# Altium PCB batt_ctrl_pcb_v3.4.PcbDoc (part 2 of 2)
Units mm, origin at the board's own origin, x right, y up, seen from the top; angles counter-clockwise.
Board outline 70 x 60 mm, 2 copper layers (Top Layer, Bottom Layer); 136 components, 122 nets, 406 pads, 183 vias.
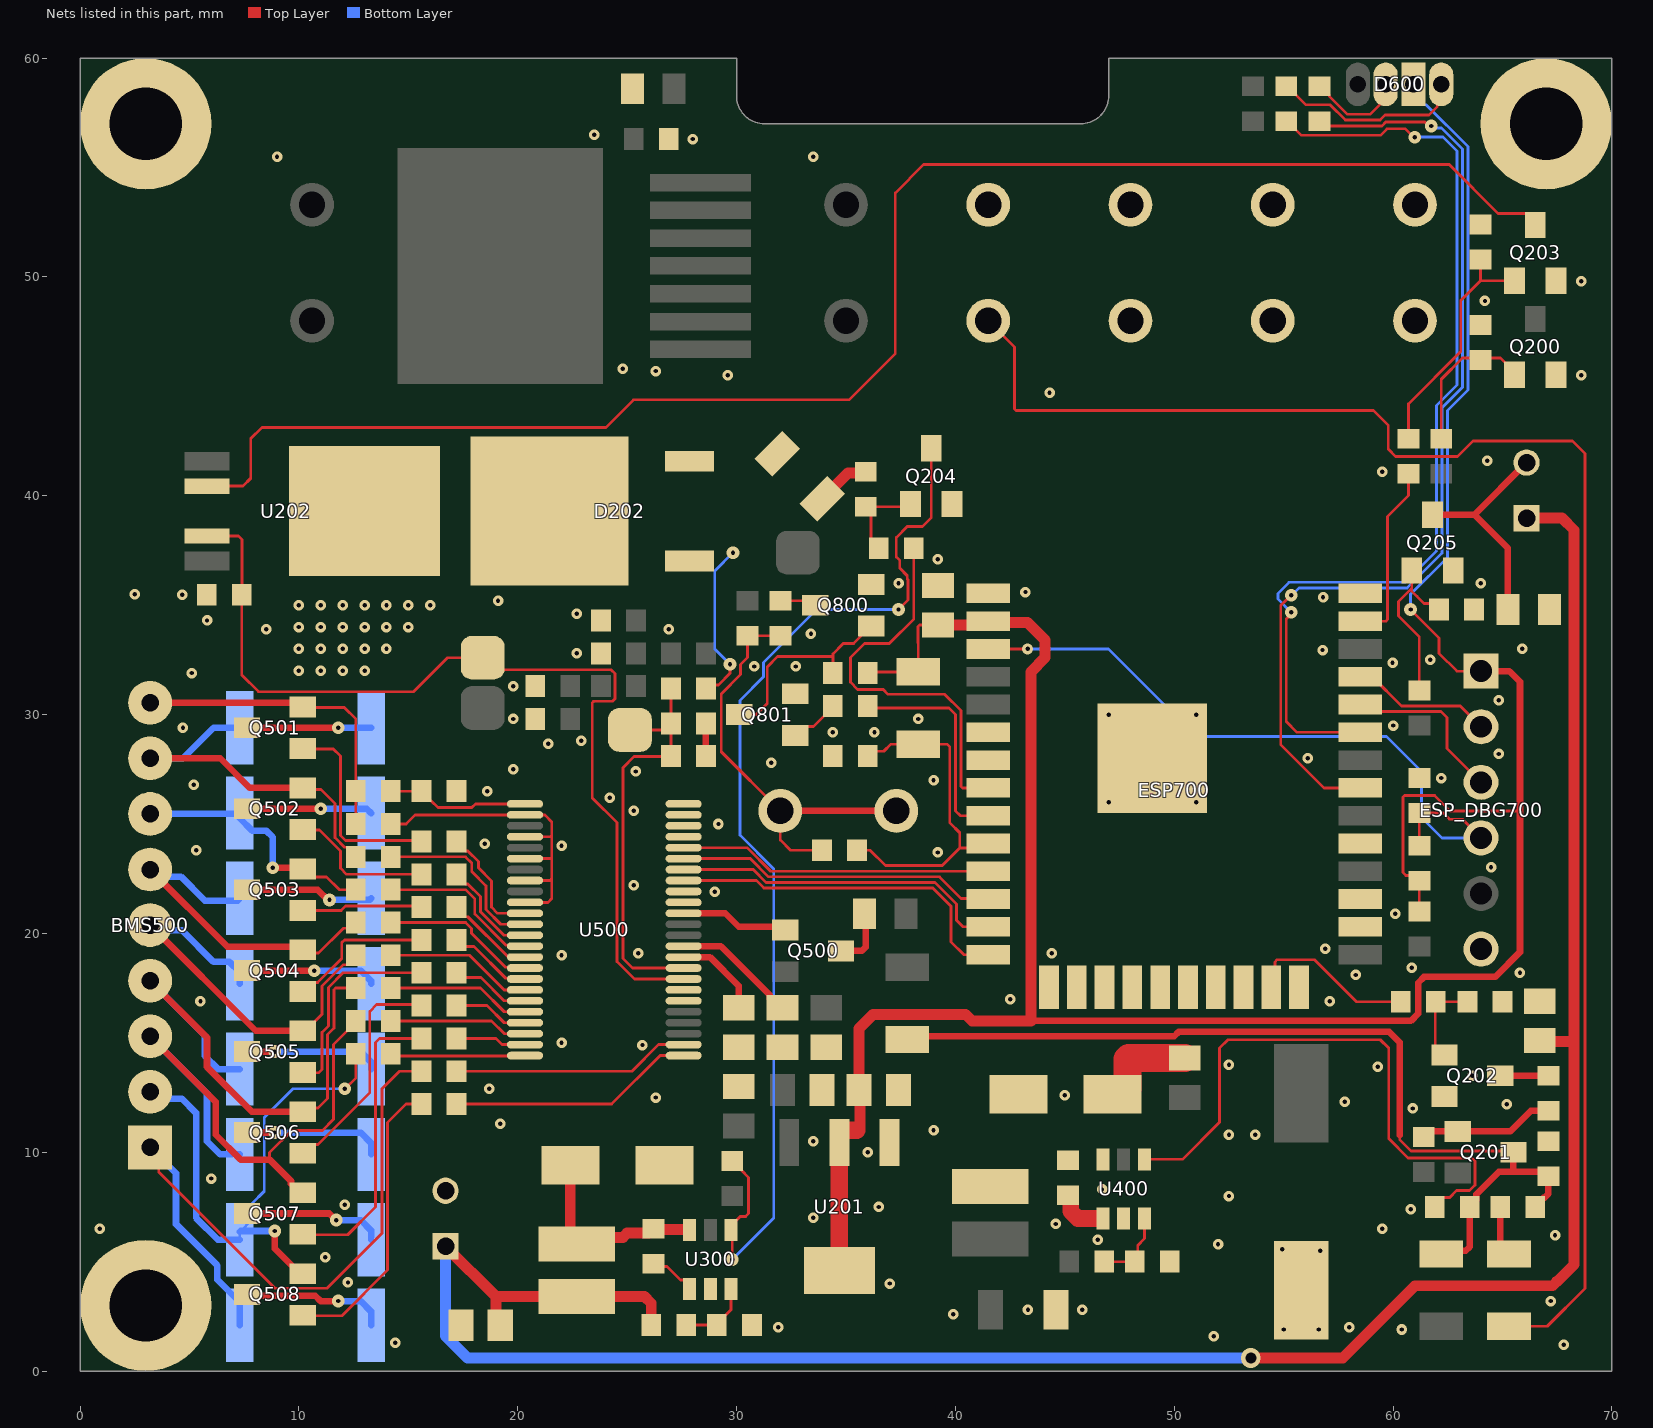
[diagram p2: the nets of this part, all layers, seen from the top]

## Via types
v1: diameter 0.48, hole 0.2, Top Layer to Bottom Layer, 147 vias
v2: diameter 0.58, hole 0.2, Top Layer to Bottom Layer, 34 vias
v3: diameter 0.9, hole 0.5, Top Layer to Bottom Layer, 1 vias
v4: diameter 0.5, hole 0.2, Top Layer to Bottom Layer, 1 vias

## Nets (pads, with @x,y where several pads share a name; then routed paths per layer and width w, separated by ;. In a path a pad name is that pad's centre, name@x,y a point inside that pad or via, vN(x,y) a via of type N, cw(c..) or ccw(c..) an arc to the next point about the centre after c; other vN are vias at no path point) (continued)
CELL1: BMS500.2 Q508.2 R521.1 R522.1 | length 26
  Top Layer w0.127: v2(12.1,12.9) 12.6,13.4 R522.1@12.6,14.5
  Top Layer w0.3: v2(8.9,6.4) 8.9,5.6 10.05,4.45 Q508.2@10.175,4.45
  Bottom Layer w0.127: R521.1@7.3,6 7.3,6.363 7.862,6.924 7.862,7.662 8.417,8.217 8.417,11.587 9.73,12.9 v2(12.1,12.9)
  Bottom Layer w0.3: BMS500.2@3.2,12.76 3.51,12.45 4.65,12.45 5.3,11.8 5.3,7 6.3,6 R521.1@7.3,6 ; R521.1@7.3,6.363 7.337,6.4 v2(8.9,6.4)
CELL2: BMS500.3 Q507.2 R518.1 R519.1 | length 27.3
  Top Layer w0.127: 8.661,9.664 8.661,9.986 9.673,10.998 11.069,10.998 11.576,11.506 11.576,14.926 12.6,15.95 R519.1@12.6,16
  Top Layer w0.3: BMS500.3@3.2,15.3 6.2,12.3 6.2,10.8 7.336,9.664 8.661,9.664 9.638,8.687 9.638,8.562 10.05,8.15 Q507.2@10.175,8.15
  Bottom Layer w0.3: BMS500.3@3.2,15.3 5.8,12.7 5.8,10.5 6.4,9.9 R518.1@7.3,9.9
CELL3: BMS500.4 Q506.2 R515.1 R516.1 | length 23.4
  Top Layer w0.127: Q506.2@10.751,12.025 10.876,12.025 11.305,12.454 11.305,15.375 11.6,15.67 11.6,17.422 11.678,17.5 R516.1@12.6,17.5
  Top Layer w0.3: BMS500.4@3.2,17.84 5.8,15.24 5.8,13.9 7.85,11.85 Q506.2@10.175,11.85
  Bottom Layer w0.3: BMS500.4@3.2,17.84 5.7,15.34 5.7,14.4 6.3,13.8 R515.1@7.3,13.8
CELL4: BMS500.5 Q505.2 R512.1 R513.1 | length 18.4
  Top Layer w0.127: Q505.2@10.712,15.961 11.056,16.306 11.056,17.597 12.023,18.563 12.214,18.563 12.6,18.95 R513.1@12.6,19
  Top Layer w0.3: BMS500.5@3.2,20.38 8.03,15.55 Q505.2@10.175,15.55
  Bottom Layer w0.3: BMS500.5@3.2,20.38 3.43,20.15 4.65,20.15 6.1,18.7 6.825,18.7 7.3,18.225 R512.1@7.3,17.7
CELL5: BMS500.6 Q504.2 R509.1 R510.1 | length 15.6
  Top Layer w0.127: Q504.2@10.766,19.1 10.9,19.1 12.034,20.234 12.334,20.234 R510.1@12.6,20.5
  Top Layer w0.3: BMS500.6@3.2,22.92 6.72,19.4 10.025,19.4 Q504.2@10.175,19.25
  Bottom Layer w0.3: BMS500.6@3.2,22.92 3.525,22.595 4.605,22.595 5.7,21.5 7.2,21.5 R509.1@7.3,21.6
CELL6: BMS500.7 Q503.2 R506.1 R507.1 | length 11.8
  Top Layer w0.127: Q503.2@10.125,23 Q503.2@10.175,22.95 10.541,22.584 11.26,22.584 11.844,22 R507.1@12.6,22
  Top Layer w0.3: v2(8.8,23) Q503.2@10.125,23
  Bottom Layer w0.3: BMS500.7@3.2,25.46 7.26,25.46 R506.1@7.3,25.5 7.3,25.261 7.862,24.7 8.5,24.7 8.8,24.4 v2(8.8,23)
CELL7: BMS500.8 Q502.2 R502.1 R503.1 | length 16.9
  Top Layer w0.127: Q502.2@10.175,26.65 10.249,26.576 11,26.576 11.646,25.93 11.646,24.375 12.085,23.937 12.214,23.937 12.6,23.55 R503.1@12.6,23.5
  Top Layer w0.3: BMS500.8@3.2,28 6.4,28 7.75,26.65 Q502.2@10.175,26.65
  Bottom Layer w0.3: BMS500.8@3.2,28 4.7,28 6.1,29.4 R502.1@7.3,29.4
CELL8: BMS500.9 Q501.2 R500.1 R504.1 | length 14.5
  Top Layer w0.127: Q501.2@10.175,30.35 10.195,30.33 12.07,30.33 12.6,29.8 R500.1@12.6,26.5 R504.1@12.6,25
  Top Layer w0.3: BMS500.9@3.2,30.54 9.985,30.54 Q501.2@10.175,30.35
CELL-: BMS500.1 R524.1 R525.1 | length 33.3
  Top Layer w0.127: BMS500.1@3.2,10.22 3.596,9.824 3.596,9.104 8.916,3.785 11.285,3.785 13.8,6.3 13.8,12.9 14.6,13.7 R525.1@15.6,13.7
  Bottom Layer w0.3: BMS500.1@3.2,10.22 4.383,9.037 4.383,6.717 6.277,4.823 6.277,4.173 7.3,3.15 R524.1@7.3,2.1
CHR_EN: ESP700.37 R214.1 | length 8.3
  Top Layer w0.127: ESP700.37@58.5,34.27 59.672,34.27 59.746,34.344 59.746,39.057 60.7,40.011 R214.1@60.7,41
CHR_I_MEAS: pad.@18.4,32.6 R215.2 U202.4 U500.32 | length 44.1
  Top Layer w0.127: U202.4@5.8,38.16 7.24,38.16 7.4,38 7.4,35.49 R215.2@7.385,35.475 7.385,31.815 8.152,31.048 15.248,31.048 16.8,32.6 pad.@18.4,32.6 18.95,32.05 24.269,32.05 24.441,31.879 24.441,30.721 24.329,30.609 23.474,30.609 23.4,30.535 23.4,26.201 24.54,25.061 24.54,18.71 25.332,17.918 U500.32@27.581,17.918
CHR_MEAS: C208.1 pad.@25.127,29.3 R213.1 R217.2 U500.33 | length 19.8
  Top Layer w0.127: pad.@24.6,29 pad.@25.127,29.3 26.7,29.3 R217.2@27,29.6 ; R213.1@27,31.2 R217.2@27,29.6 ; U500.33@27.581,18.418 25.242,18.418 24.808,18.852 24.808,27.571 25.319,28.081 26.981,28.081 C208.1@27,28.1 R217.2@27,29.6
CHR_POS: CHR+200.1 D201.1 D202.1 D202.3 R213.2 R226.2 | length 82.5
  Top Layer w0.127: R213.2@28.6,31.2 28.754,31.354 29.166,31.354 29.7,31.888 v2(29.7,32.3) ; CHR+200.1@41.5,48 42.7,46.8 42.7,43.974 42.774,43.9 59.1,43.9 59.783,43.217 59.783,42.124 60.107,41.8 62.95,41.8 63.65,42.5 68.2,42.5 68.773,41.927 68.773,3.777 67.045,2.049 D201.1@65.3,2.049
  Bottom Layer w0.127: v2(29.7,32.3) 29,33 29,36.566 v2(29.834,37.4)
CHR_SUP: D202.2 U202.3
  other v1: 10,32 11,32 12,32 13,32 10,33 11,33 12,33 13,33 14,33 10,34 11,34 12,34 13,34 14,34 15,34 10,35 11,35 12,35 13,35 14,35 15,35 16,35
COM_EN: D200.2 D203.1 Q201.3 R208.2 R210.1 R224.2 | length 43.1
  Top Layer w0.127: 60.3,10.778 60.3,10.581 60.821,10.059 65.441,10.059 Q201.3@65.5,10
  Top Layer w0.3: D203.1@37.8,15.149 37.951,15.3 50,15.3 50.2,15.5 59.824,15.5 60.3,15.024 60.3,10.778 ; D200.2@62.2,5.351 62.349,5.5 63.324,5.5 63.5,5.676 R208.2@63.5,7.5 63.8,7.8 63.8,8.074 64.826,9.1 65.5,9.1 ; Q201.3@65.5,10 65.5,9.1 ; R224.2@66.5,7.5 66.5,7.55 66.874,7.924 66.924,7.924 67.1,8.1 R210.1@67.1,8.9 66.9,9.1 65.5,9.1
DATABUS: BLDC_DATA800.1 R800.1 R802.2 R803.2 | length 20
  Top Layer w0.127: R802.2@32.05,33.6 R802.2@32,33.6 R800.1@30.5,33.6 30.5,32.609 30.18,32.289 30.18,31.829 29.3,30.948 29.3,28.3 BLDC_DATA800.1@32,25.6 32,24.268 32.468,23.8 R803.2@33.9,23.8 ; 34.6,25.65 34.65,25.6
  Top Layer w0.3: BLDC_DATA800.1@32,25.6 34.65,25.6 BLDC_DATA800.1@37.3,25.6
DCDC_EN: ESP700.23 R211.1 | length 7.8
  Top Layer w0.127: ESP700.23@54.435,17.54 54.6,17.705 54.6,18.7 54.7,18.8 56.4,18.8 58.324,16.876 R211.1@60.35,16.876
DRIVE: Q500.1 U500.38 | length 5
  Top Layer w0.3: U500.38@27.581,20.918 29.482,20.918 30.1,20.3 32.075,20.3 Q500.1@32.225,20.15
DTR: C100.1 ESP700.3 ESP_DBG700.4 R700.2 | length 32.1
  Top Layer w0.127: ESP700.3@41.5,33 v4(43.3,33) ; R700.2@61.2,24 C100.1@61.2,25.5 62.3,25.5 62.58,25.22 63.162,25.22 ESP_DBG700.4@64.018,24.364
  Bottom Layer w0.127: v4(43.3,33) 47,33 51,29 59.7,29 61.3,27.4 61.3,25.3 62.236,24.364 ESP_DBG700.4@64.018,24.364
GND: BAT-200.1 BLDC-200.1 C100.2 C200.2 C201.2 C202.- C203.1 C204.2 C205.2 C206.2 C207.2 C208.2 C209.2 C210.2 C211.2 C500.2 C501.2 C502.2 C503.2 CHR-200.1 CN200.2 D300.A D400.A ESP700.1 ESP700.15 ESP700.27 ESP700.38 ESP700.39 ESP_DBG700.6 MH200.1 MH201.1 MH202.1 Q200.2 Q202.2 Q203.2 Q204.2 Q205.2 Q800.2 Q801.2 R202.1 R204.1 R205.1 R206.1 R207.1 R210.2 R212.1 R215.1 R216.1 R217.1 R221.2 R223.1 R225.1 R226.1 R301.1 R401.1 R804.1 U201.1 U300.2 U400.2 U500.30 U500.31 U500.40 U500.45 U500.46 U500.47 U500.48 | length 9.1
  Top Layer w0.3: C208.2@28.6,28.1 R217.1@28.6,29.6 ; R301.1@30.489,2.311 R301.1@30.7,2.1
  Top Layer w0.5: R226.1@33.918,39.869 35.085,41.035 35.835,41.035 R221.2@35.9,41.1
  Top Layer w1.27: D400.A@47.18,12.644 47.63,12.644 47.87,12.884 47.87,14.252 47.924,14.306 C203.1@50.482,14.306
  other v1: 67.8,1.2 14.4,1.3 51.8,1.6 55,1.9 56.6,1.9 60.4,1.9 31.9,2 58,2 39.9,2.6 43.314,2.8 45.8,2.8 67.2,3.2 37,4 12.24,4.05 11.2,5.2 56.667,5.5 54.933,5.559 52,5.8 46.5,6 67.4,6.2 0.9,6.5 59.5,6.5 44.585,6.721 33.5,7 60.8,7.4 36.5,7.5 12.1,7.6 52.5,8 46.7,8.3 6,8.8 36,10 33.5,10.5 52.5,10.8 53.7,10.8 39,11 19.2,11.3 60.9,12 65.2,12.2 57.8,12.3 26.3,12.5 45,12.6 18.7,12.9 63.625,13.5 59.3,13.9 52.5,14 25.7,14.9 22,15 5.5,16.9 57.1,16.9 42.5,17 58.3,18.1 65.8,18.2 60.85,18.425 22,19 25.5,19.1 44.4,19.1 56.9,19.3 60.1,20.9 29,21.9 25.3,22.2 64.475,23.025 39.2,23.7 5.3,23.8 22,24 18.5,24.1 29.171,25 25.3,25.6 47,26 51,26 24.2,26.2 18.6,26.5 5.2,26.8 39,27 62.2,27.1 25.4,27.4 19.8,27.5 31.589,27.801 56.1,28 64.825,28.2 21.395,28.66 22.9,28.8 34.4,29.2 36.3,29.2 4.7,29.4 60,29.5 19.8,29.8 38.3,29.8 47,30 51,30 64.825,30.65 19.8,31.3 5.1,31.9 30.8,32.2 32.7,32.2 59.975,32.375 61.7,32.5 22.7,32.8 56.775,32.95 65.9,33 33.4,33.7 8.5,33.9 26.895,33.9 5.8,34.3 22.7,34.6 19.1,35.2 56.8,35.358 4.672,35.475 2.5,35.5 43.2,35.6 37.4,36 64,36 39.2,37.1 59.5,41.1 64.3,41.6 44.3,44.7 29.6,45.5 68.6,45.5 26.3,45.7 24.8,45.8 64.2,48.9 68.6,49.8 9,55.5 33.5,55.5 28,56.3 23.5,56.5
GRED_LED_OD: ESP700.31 R601.2 | length 45.2
  Top Layer w0.127: v2(55.347,35.458) 54.864,34.976 54.864,28.627 56.841,26.65 ESP700.31@58.5,26.65 ; R601.2@56.642,57.112 56.858,56.896 59.489,56.896 59.667,57.074 61.447,57.074 61.625,56.896 v2(61.747,56.896)
  Bottom Layer w0.127: v2(55.347,35.458) 55.366,35.458 55.696,35.789 60.645,35.789 62.233,37.377 62.233,44.021 63.17,44.958 63.17,55.851 62.211,56.809 61.834,56.809 v2(61.747,56.896)
GREEN_LED_C: D600.GC R601.1 | length 4.5
  Top Layer w0.127: R601.1@56.642,58.712 56.692,58.712 57.079,58.325 57.079,58.275 57.925,57.429 58.953,57.429 59.66,58.136 D600.GC@59.66,58.8
I34: ESP700.6
I35: ESP700.7
IO2: ESP700.24
IO4: ESP700.26
IO5: ESP700.29
IO6: ESP700.20
IO7: ESP700.21
IO8: ESP700.22
IO9: ESP700.17
IO10: ESP700.18
IO11: ESP700.19
IO13: ESP700.16
LIGHT_5V: C209.1 C210.1 CN200.1 CN201.1 L300.2 R300.2 | length 108.1
  Top Layer w0.5: CN200.1@16.7,5.7 19,3.4 ; C209.1@19.2,2.1 19,2.3 19,3.4 ; R300.2@26.1,2.1 26.1,3.1 25.8,3.4 L300.2@22.7,3.4 19,3.4 ; v3(53.5,0.6) 57.7,0.6 61,3.9 67.292,3.9 67.477,4.085 67.485,4.085 68.277,4.877 68.277,38.423 67.725,38.975 CN201.1@66.1,38.975 ; C210.1@66.7,15.1 66.731,15.069 68.1,15.069
  Bottom Layer w0.5: CN200.1@16.7,5.7 16.7,1.6 17.7,0.6 v3(53.5,0.6)
LIGHTS_OFF: ESP700.8 R220.2 | length 18.3
  Top Layer w0.127: R220.2@38.1,37.6 38.1,34.375 36.975,33.25 35.85,33.25 35.2,32.6 35.2,31.481 35.531,31.15 36.7,31.15 36.925,30.925 39.513,30.925 40.254,30.184 40.254,26.724 40.328,26.65 ESP700.8@41.5,26.65
LOAD0: R523.2 U500.25 | length 11.3
  Top Layer w0.127: R523.2@17.2,12.2 24.291,12.2 26.509,14.418 U500.25@27.581,14.418
LOAD1: R520.2 U500.23 | length 3.2
  Top Layer w0.127: R520.2@17.2,15.2 19,15.2 19.282,14.918 U500.23@20.331,14.918
LOAD2: R517.2 U500.21 | length 3.5
  Top Layer w0.127: R517.2@17.2,16.7 18.6,16.7 19.382,15.918 U500.21@20.331,15.918
LOAD3: R514.2 U500.19 | length 3.7
  Top Layer w0.127: R514.2@17.2,18.2 17.415,17.985 18.315,17.985 19.382,16.918 U500.19@20.331,16.918
LOAD4: R511.2 U500.17 | length 3.9
  Top Layer w0.127: R511.2@17.2,19.7 17.501,19.399 18.001,19.399 19.45,17.95 20.299,17.95 U500.17@20.331,17.918
LOAD5: R508.2 U500.15 | length 4.1
  Top Layer w0.127: R508.2@17.2,21.2 17.2,21.15 17.587,20.763 17.715,20.763 19.518,18.961 20.288,18.961 U500.15@20.331,18.918
LOAD6: R505.2 U500.13 | length 4.7
  Top Layer w0.127: R505.2@17.2,22.7 17.2,22.65 17.587,22.263 17.715,22.263 18.292,21.687 18.292,20.99 19.364,19.918 U500.13@20.331,19.918
LOAD7: R501.2 U500.11 | length 5.4
  Top Layer w0.127: R501.2@17.2,24.2 17.2,24.15 17.587,23.763 17.715,23.763 18.2,23.279 18.2,23 18.8,22.4 18.8,21.2 19.082,20.918 U500.11@20.331,20.918
MEAS0: R525.2 U500.26 | length 10.9
  Top Layer w0.127: R525.2@17.2,13.7 25.214,13.7 26.432,14.918 U500.26@27.581,14.918
MEAS1: R522.2 U500.24 | length 6.2
  Top Layer w0.127: R522.2@14.2,14.5 14.3,14.4 20.313,14.4 U500.24@20.331,14.418
MEAS2: R519.2 U500.22 | length 6.4
  Top Layer w0.127: R519.2@14.2,16 18.8,16 19.382,15.418 U500.22@20.331,15.418
MEAS3: R516.2 U500.20 | length 6.6
  Top Layer w0.127: R516.2@14.2,17.5 18.3,17.5 19.382,16.418 U500.20@20.331,16.418
MEAS4: R513.2 U500.18 | length 6.8
  Top Layer w0.127: R513.2@14.2,19 17.8,19 19.382,17.418 U500.18@20.331,17.418
MEAS5: R510.2 U500.16 | length 7.1
  Top Layer w0.127: R510.2@14.2,20.5 17.619,20.5 17.892,20.227 17.892,20.008 19.45,18.45 20.299,18.45 U500.16@20.331,18.418
MEAS6: R507.2 U500.14 | length 7.6
  Top Layer w0.127: R507.2@14.2,22 17.619,22 18.038,21.581 18.038,20.884 19.462,19.461 20.288,19.461 U500.14@20.331,19.418
MEAS7: R503.2 U500.12 | length 8.3
  Top Layer w0.127: R503.2@14.2,23.5 17.619,23.5 17.9,23.219 17.9,22.821 18.546,22.175 18.546,21.095 19.223,20.418 U500.12@20.331,20.418
NetC500_1: C500.1 R500.2 U500.1 | length 6.5
  Top Layer w0.127: R500.2@14.2,26.5 C500.1@15.6,26.5 15.6,26.45 15.987,26.063 16.037,26.063 16.35,25.75 17.9,25.75 18.068,25.918 U500.1@20.331,25.918
NetCN201_2: CN201.2 Q205.3 R225.2 | length 10.3
  Top Layer w0.3: Q205.3@61.8,39.133 63.718,39.133 ; R225.2@65.25,34.8 65.25,37.602 63.718,39.133 ; CN201.2@66.1,41.515 63.718,39.133
NetD201_2: D201.2 R224.1 | length 2.3
  Top Layer w0.3: R224.1@64.9,7.5 64.9,5.751 D201.2@65.3,5.351
NetQ200_1: Q200.1 R203.2 R206.2 | length 6.9
  Top Layer w0.127: R203.2@62.2,42.6 62.2,45.326 63.164,46.29 63.855,46.29 64.91,46.29 65.55,45.65 Q200.1@65.55,45.525
NetQ201_1: Q201.1 R209.1 R219.1 | length 6.2
  Top Layer w0.3: R219.1@61.4,10.7 61.65,10.95 Q201.1@62.95,10.95 65.35,10.95 66.3,11.9 R209.1@67.1,11.9
NetQ202_1: Q202.1 R211.2 R212.2 | length 3.6
  Top Layer w0.127: Q202.1@61.925,14.75 61.925,16.851 R211.2@61.95,16.876 R212.2@63.4,16.876
NetQ202_3: Q202.3 R209.2 | length 2.2
  Top Layer w0.3: Q202.3@64.9,13.5 R209.2@67.1,13.5
NetQ203_1: Q203.1 R214.2 R216.2 | length 11.3
  Top Layer w0.127: R214.2@60.7,42.6 60.7,44.2 63.092,46.592 63.092,48.92 63.997,49.825 ; R216.2@64,50.8 63.997,50.797 63.997,49.825 ; Q203.1@65.41,49.685 Q203.1@65.55,49.825 63.997,49.825
NetQ203_3: Q203.3 U202.2 | length 73.4
  Top Layer w0.127: U202.2@5.8,40.44 7.44,40.44 7.8,40.8 7.8,42.614 8.311,43.125 24.025,43.125 25.283,44.383 35.142,44.383 37.254,46.495 37.254,53.839 38.547,55.132 62.566,55.132 64.798,52.9 66.088,52.9 66.5,52.489 Q203.3@66.5,52.375
NetQ204_1: Q204.1 R220.1 R221.1 | length 4.3
  Top Layer w0.127: R220.1@36.5,37.6 36.145,37.955 36.145,39.255 R221.1@35.9,39.5 37.825,39.5 Q204.1@37.95,39.625
NetQ205_1: Q205.1 R222.2 R223.2 | length 7.8
  Top Layer w0.127: Q205.1@60.85,36.583 60.85,35.758 ; R222.2@61.2,31.1 61.2,33.554 60.254,34.5 60.254,35.162 60.85,35.758 ; R223.2@62.1,34.8 61.819,35.081 61.419,35.081 61.1,35.4 60.85,35.65 60.85,35.758
NetQ500_3: Q500.3 R1.2 | length 2.7
  Top Layer w0.3: Q500.3@34.775,19.2 35.724,19.2 35.9,19.376 35.9,20.85 R1.2@35.85,20.9
NetQ501_1: Q501.1 R501.1 | length 9.3
  Top Layer w0.127: Q501.1@10.175,28.45 10.195,28.43 11.57,28.43 11.9,28.1 11.9,24.481 12.131,24.25 15.55,24.25 R501.1@15.6,24.2
NetQ501_3: Q501.3 R502.2 | length 5.7
  Top Layer w0.3: Q501.3@7.625,29.4 v2(11.8,29.4)
  Bottom Layer w0.3: v2(11.8,29.4) R502.2@13.3,29.4
NetQ502_1: Q502.1 R505.1 | length 6.7
  Top Layer w0.127: Q502.1@10.175,24.75 10.195,24.73 10.932,24.73 11.9,23.762 11.9,22.981 12.181,22.7 R505.1@15.6,22.7
NetQ502_3: Q502.3 R506.2 | length 5.8
  Top Layer w0.3: Q502.3@7.625,25.7 v2(11,25.7)
  Bottom Layer w0.3: v2(11,25.7) 13.1,25.7 R506.2@13.3,25.5
NetQ503_1: Q503.1 R508.1 | length 5.5
  Top Layer w0.127: Q503.1@10.175,21.05 11.931,21.05 12.131,21.25 15.55,21.25 R508.1@15.6,21.2
NetQ503_3: Q503.3 R509.2 | length 5.9
  Top Layer w0.3: Q503.3@7.625,22 10.855,22 11.324,21.531 v2(11.4,21.531)
  Bottom Layer w0.3: v2(11.4,21.531) 13.231,21.531 R509.2@13.3,21.6
NetQ504_1: Q504.1 R511.1 | length 6.8
  Top Layer w0.127: Q504.1@10.175,17.35 10.583,17.758 10.858,17.758 11.96,18.86 11.96,19.579 12.081,19.7 R511.1@15.6,19.7
NetQ504_3: Q504.3 R512.2 | length 6
  Top Layer w0.3: Q504.3@7.625,18.3 v2(10.7,18.3)
  Bottom Layer w0.3: v2(10.7,18.3) 12.825,18.3 13.3,17.825 R512.2@13.3,17.7
NetQ505_1: Q505.1 R514.1 | length 9.3
  Top Layer w0.127: Q505.1@10.175,13.65 10.195,13.63 10.891,13.63 11.051,13.79 11.051,15.48 11.346,15.775 11.346,17.528 12.018,18.2 R514.1@15.6,18.2
NetQ505_3: Q505.3 R515.2 | length 6.2
  Top Layer w0.3: Q505.3@7.625,14.6 v2(8.9,14.6)
  Bottom Layer w0.3: v2(8.9,14.6) 12.825,14.6 13.3,14.125 R515.2@13.3,13.8
NetQ506_1: Q506.1 R517.1 | length 10.4
  Top Layer w0.127: Q506.1@10.175,9.95 10.575,10.35 10.865,10.35 13.241,12.726 13.241,16.441 13.55,16.75 15.55,16.75 R517.1@15.6,16.7
NetQ506_3: Q506.3 R518.2 | length 6.4
  Top Layer w0.3: Q506.3@7.625,10.9 7.627,10.902 v2(8.898,10.902)
  Bottom Layer w0.3: v2(8.898,10.902) 8.9,10.9 12.825,10.9 13.3,10.425 R518.2@13.3,9.9
NetQ507_1: Q507.1 R520.1 | length 13.6
  Top Layer w0.127: Q507.1@10.175,6.25 10.195,6.23 12.23,6.23 13.495,7.495 13.495,15.014 13.681,15.2 R520.1@15.6,15.2
NetQ507_3: Q507.3 R521.2 | length 6.4
  Top Layer w0.3: Q507.3@7.625,7.2 11.384,7.2 11.684,6.9 v2(11.7,6.9)
  Bottom Layer w0.3: v2(11.7,6.9) 12.825,6.9 13.3,6.425 R521.2@13.3,6
NetQ508_1: Q508.1 R523.1 | length 13.4
  Top Layer w0.127: Q508.1@10.175,2.55 10.195,2.53 11.966,2.53 14.054,4.618 14.054,11.354 14.9,12.2 R523.1@15.6,12.2
NetQ508_3: Q508.3 R524.2 | length 6.6
  Top Layer w0.3: Q508.3@7.625,3.5 7.681,3.444 10.748,3.444 10.992,3.2 v2(11.8,3.2)
  Bottom Layer w0.3: v2(11.8,3.2) 12.825,3.2 13.3,2.725 R524.2@13.3,2.1
NetR504_2: R504.2 U500.2 U500.4 U500.6 U500.8 U500.10 | length 16.2
  Top Layer w0.127: R504.2@14.2,25 14.9,25 15.31,25.41 21.246,25.41 21.556,25.1 21.556,24.47 ; U500.10@20.331,21.418 21.382,21.418 21.556,21.592 21.556,22.507 ; U500.8@20.331,22.418 21.467,22.418 21.556,22.507 ; U500.6@20.331,23.418 21.553,23.418 21.556,23.421 ; U500.4@20.331,24.418 21.504,24.418 21.556,24.47 ; 21.556,22.507 21.556,23.421 ; 21.556,23.421 21.556,24.47
RED_LED_C: D600.RC R600.1 | length 8.9
  Top Layer w0.127: R600.1@55.118,58.712 55.168,58.712 56.015,57.865 57.13,57.865 57.819,57.175 59.41,57.175 59.638,57.404 61.646,57.404 62.014,57.772 62.014,58.614 D600.RC@62.2,58.8
RED_LED_OD: ESP700.33 R600.2 | length 45.1
  Top Layer w0.127: R600.2@55.118,57.112 55.168,57.112 55.809,56.471 59.424,56.471 59.72,56.767 60.56,56.767 60.939,56.388 v2(60.985,56.388) ; v2(55.347,34.671) 55.347,34.599 55.118,34.37 55.118,29.682 55.61,29.19 ESP700.33@58.5,29.19
  Bottom Layer w0.127: v2(55.347,34.671) 54.739,35.279 54.739,35.536 55.245,36.043 60.539,36.043 61.979,37.482 61.979,44.126 62.916,45.063 62.916,55.746 62.274,56.388 v2(60.985,56.388)
RX: D800.1 ESP700.10 R803.1 R804.2 | length 15.5
  Top Layer w0.127: R803.1@35.5,23.8 36.1,23.8 36.8,23.1 39.4,23.1 40.2,23.9 ; R804.2@36,28.1 36.224,28.324 36.724,28.324 37.049,28.649 D800.1@38.3,28.649 39.622,28.649 39.746,28.525 39.746,25.054 40.2,24.6 40.2,23.9 ; ESP700.10@41.5,24.11 41.29,23.9 40.2,23.9
RXD: ESP700.35 ESP_DBG700.2 | length 6.5
  Top Layer w0.127: ESP700.35@58.5,31.73 59.05,31.73 60.385,30.395 63.067,30.395 ESP_DBG700.2@64.018,29.444
SPI_CS0: ESP700.14 U500.41 | length 16.3
  Top Layer w0.127: U500.41@27.581,22.418 30.904,22.418 31.244,22.078 38.963,22.078 39.8,21.241 39.8,19.611 40.381,19.03 ESP700.14@41.5,19.03
SPI_MISO: ESP700.11 U500.44 | length 14.4
  Top Layer w0.127: U500.44@27.581,23.918 30.482,23.918 31.56,22.84 ESP700.11@41.5,22.84
SPI_MOSI: ESP700.12 U500.43 | length 14.7
  Top Layer w0.127: U500.43@27.581,23.418 30.623,23.418 31.455,22.586 39.27,22.586 40.256,21.6 41.47,21.6 ESP700.12@41.5,21.57
SPI_MSCK: ESP700.13 U500.42 | length 15.4
  Top Layer w0.127: U500.42@27.581,22.918 30.764,22.918 31.35,22.332 39.068,22.332 40.054,21.346 40.054,20.604 40.358,20.3 ESP700.13@41.5,20.3
T\X\: Q800.1 Q801.3 R801.1 | length 9.5
  Top Layer w0.127: Q801.3@30.125,30 30.9,30 31.4,30.5 31.4,32.176 31.874,32.65 34.4,32.65 ; R801.1@34.4,31.9 34.4,32.65 ; Q800.1@36.15,34.05 35.35,33.25 34.875,33.25 34.4,32.775 34.4,32.65
T\X\C: Q800.3 R802.1 | length 1.7
  Top Layer w0.127: R802.1@32,35.2 33.4,35.2 Q800.3@33.6,35
TX: ESP700.9 R805.1 | length 10.2
  Top Layer w0.127: R805.1@36,30.4 36.1,30.3 39.7,30.3 40,30 40,25.6 40.22,25.38 ESP700.9@41.5,25.38
TXB: Q801.1 R805.2 | length 2.3
  Top Layer w0.127: Q801.1@32.675,29.05 33.087,29.462 33.512,29.462 34.4,30.35 R805.2@34.4,30.4
TXD: ESP700.34 ESP_DBG700.3 | length 7.8
  Top Layer w0.127: ESP700.34@58.5,30.46 58.819,30.141 62.185,30.141 62.466,29.86 62.466,28.456 ESP_DBG700.3@64.018,26.904
U_ME3116_5V1_BS: C300.1 U300.1 | length 2.2
  Top Layer w0.127: C300.1@26.2,4.9 26.316,4.784 26.816,4.784 27.442,4.158 27.614,4.158 27.85,3.921 U300.1@27.85,3.75
U_ME3116_5V1_EN: Q204.3 R218.1 U300.4 | length 50.5
  Top Layer w0.127: v2(29.8,5.1) 29.8,6.4 U300.4@29.75,6.45 29.75,6.65 30.166,7.066 30.416,7.066 30.55,7.2 30.55,8.85 30.237,9.163 30.237,9.213 29.85,9.6 R218.1@29.8,9.6 ; v2(37.4,34.8) 37.83,35.23 37.83,36.178 37.8,36.209 37.8,36.346 37.459,36.687 37.459,37.041 37.3,37.2 37.3,38.1 37.8,38.6 38.5,38.6 38.9,39 Q204.3@38.9,42.175
  Bottom Layer w0.127: v2(29.8,5.1) 31.7,7 31.7,22.94 30.15,24.49 30.15,30.65 31.23,31.73 31.23,32.378 33.652,34.8 v2(37.4,34.8)
U_ME3116_5V1_FB: R300.1 R301.2 U300.3 | length 3.3
  Top Layer w0.127: R300.1@27.7,2.1 R301.2@29.1,2.1 29.1,2.15 29.75,2.8 U300.3@29.75,3.75
U_ME3116_5V1_SW: C300.2 D300.K L300.1 U300.6 | length 9.2
  Top Layer w0.5: D300.K@22.4,9.4 22.4,6.1 L300.1@22.7,5.8 23,6.1 24.8,6.1 25,6.3 26,6.3 C300.2@26.2,6.5 26.225,6.475 27.825,6.475 U300.6@27.85,6.45
U_ME3116_5V2_BS: C400.1 U400.1 | length 2.1
  Top Layer w0.762: C400.1@45.148,8.034 45.198,8.034 45.267,7.965 45.267,7.303 45.594,6.976 46.418,6.976
U_ME3116_5V2_EN: R208.1 U400.4 | length 27.4
  Top Layer w0.127: U400.4@48.638,9.676 50.376,9.676 52.069,11.369 52.069,14.755 52.455,15.141 59.415,15.141 59.8,14.755 59.8,10.631 60.69,9.741 63.604,9.741 63.741,9.604 63.741,8.496 63.494,8.25 62.903,8.25 62.59,7.937 62.287,7.937 61.9,7.55 R208.1@61.9,7.5
U_ME3116_5V2_FB: R400.1 R401.2 U400.3 | length 3.6
  Top Layer w0.127: R400.1@46.8,5 R401.2@48.2,5 48.335,5.135 48.335,5.75 48.638,6.053 U400.3@48.638,6.976
U_ME3116_5V2_SW: C400.2 D400.K L400.1 U400.6
VCC: C206.1 C207.1 D600.CA D800.2 ESP700.2 ESP_DBG700.1 R700.1 R701.1 R801.2 U201.2 U201.4 | length 129.8
  Top Layer w0.127: R801.2@36,31.9 36.051,31.951 D800.2@38.3,31.951 38.3,33.266 38.293,33.272 38.293,34.026 38.368,34.1 C207.1@39.2,34.1 ; v2(60.8,34.8) 62.1,33.5 62.1,32.8 62.916,31.984 ESP_DBG700.1@64.018,31.984 ; R701.1@61.2,21 R700.1@61.2,22.4 60.957,22.643 60.584,22.643 60.45,22.777 60.45,26.226 60.524,26.3 61.9,26.3 62.6,25.6 65.78,25.6 65.8,25.58
  Top Layer w0.3: ESP700.2@41.33,34.1 41.43,34.2 ESP700.2@41.5,34.27 ; 43.448,16 60.816,16 61.15,16.334 61.15,17.75 61.414,18.014 64.668,18.014 65.8,19.146 65.8,25.58 65.8,31.5 65.316,31.984 ESP_DBG700.1@64.018,31.984
  Top Layer w0.5: 35.5,11 35.63,11.13 35.63,12.88 C206.1@35.6,12.85 35.6,15.661 36.239,16.3 40.471,16.3 40.771,16 43.448,16 43.448,31.948 44.1,32.6 44.1,33.4 43.3,34.2 ESP700.2@41.43,34.2 ; C207.1@39.2,34.1 ESP700.2@41.33,34.1
  Top Layer w0.8: U201.4@34.7,4.59 U201.2@34.7,10.45 34.7,10.95 34.75,11 35.5,11
  Bottom Layer w0.127: v2(60.8,34.8) 60.8,35.5 62.487,37.187 62.487,43.902 63.424,44.839 63.424,55.956 61.517,57.863 61.417,57.863 60.93,58.35 D600.CA@60.93,58.8
VREF1: C501.1 U500.35 | length 5.8
  Top Layer w0.3: U500.35@27.581,19.418 29.282,19.418 31.525,17.175 31.525,17.025 31.95,16.6 C501.1@32.1,16.6
VREF2: C502.1 U500.34 | length 4.1
  Top Layer w0.3: U500.34@27.581,18.918 28.782,18.918 30.1,17.6 C502.1@30.1,16.6
WDT_OUT: U500.39
pads on no net: ESP700.32 U500.3 U500.5 U500.7 U500.9

## Polygon pours and split planes (outlines as drawn)
U_ME3116_5V2_SW on Top Layer "SW" (solid, remove dead copper, pour order 0): 47.18,9.088 47.18,10.866 45.148,10.866 44.386,11.628 44.386,13.66 40.068,13.66 39.56,13.152 39.56,7.564 39.814,7.31 43.37,7.31 43.624,7.564 43.624,8.834 43.878,9.088 46.164,9.088
BLDC_POS on Top Layer "BLDC_POS" (solid, remove dead copper, pour order 7): 26.1,54.7 35.8,54.7 36.5,54 36.4,53.9 36.4,46.7 36,46.3 26.1,46.3
BATT_POS on Top Layer "BATT_POS" (solid, pour order 5): 23.9,48.7 25.3,50.1 30.777,50.1 30.777,51.243 25.8,51.243 23.9,53.143 23.9,55.9 10.1,55.9 0.5,46.772 0.5,36.5 6.9,36.5 6.9,42.4 8,43.5 23.9,43.5 23.9,45.1
CHR_POS on Top Layer "CHR_POS_SUP" (solid, pour order 8): 26.5,36.5 26.5,44.1 35.4,44.1 38,46.7 38,53 40,55 42.5,55 43.5,54 43.5,44.5 42.5,43.5 41,43.5 40.5,43 38.2,43 38.2,41.8 34.8,41.8 29.5,36.5
CHR_SUP on Top Layer "CHR_POS_SUP2" (solid, pour order 10): 9.5,42.5 25,42.5 25,35.998 24.952,35.95 24.927,35.975 18.775,35.95 14.2,31.1 9.5,31.1
GND on Top Layer "TOP_GND" (solid, remove dead copper, pour order 11): 0,0 0,60 30,60 30,58.27 ccw(c31.27,58.27) 31.27,57 45.73,57 ccw(c45.73,58.27) 47,58.27 47,60 70,60 70,0
CHR_SUP on Bottom Layer "CHR_POS_SUP2_BTN" (solid, pour order 4): 9.502,36.521 0.693,36.521 0.693,52.8 8.541,52.8 8.541,45.2 12.7,45.2 12.7,56 23.298,56 23.305,42.521 25.02,42.521 25.02,36.019 24.972,35.971 24.947,35.996 18.795,35.971 14.22,31.121 9.52,31.121
GND on Bottom Layer "BOT_GND" (solid, remove dead copper, pour order 9): 0,0 0,60 30,60 30,58.27 ccw(c31.27,58.27) 31.27,57 45.73,57 ccw(c45.73,58.27) 47,58.27 47,60 70,60 70,0

## Silkscreen, mask and mechanical layers (free items; w line width, h text height)
Top Overlay:
  text "BAT+" at 8.355,43.838 h2
  text "BLDC+" at 32.408,43.838 h2
  text "CHR+" at 38.442,43.838 h2
  text "GND" at 45.635,43.838 h2
  text "GND" at 52.609,43.838 h2
  text "GND" at 59.109,43.838 h2
  text "-" at 68.5,43.823 h3
  text "MI" at 34.193,37.154 h1
  text "+" at 68.277,34.557 h3
  text "CI" at 19.793,32.498 h1
  text "BV" at 15.354,29.654 h1
  text "CV" at 22.108,27.222 h1
  text "PCBv3.4" at 71.4,13.8 h5 r90
  text "+" at 14.9,1.19 h3
Bottom Overlay:
  text "VCC" at 69.627,31.388 h1.6
  text "RXD" at 69.159,28.848 h1.6
  text "TXD" at 69.08,26.33 h1.6
  text "RESET" at 70.202,23.768 h1.6
  text "BOOT" at 69.759,21.228 h1.6
  text "GND" at 69.759,18.688 h1.6
Outline:
  lines w0.254: 0,0 70,0 70,60 47,60 47,59 47,58.27 cw(c45.73,58.27) 45.73,57 31.27,57 cw(c31.27,58.27) 30,58.27 30,59 30,60 0,60 0,0